# Altium PCB AS800-Temp V1.1.PcbDoc (part 3 of 3)
Units mil, origin at the board's own origin, x right, y up, seen from the top; angles counter-clockwise.
Board outline 4813.18 x 5128.14 mil, 2 copper layers (Top Layer, Bottom Layer); 246 components, 215 nets, 915 pads, 639 vias.
Unrouted connection lines stored in the file: 2.
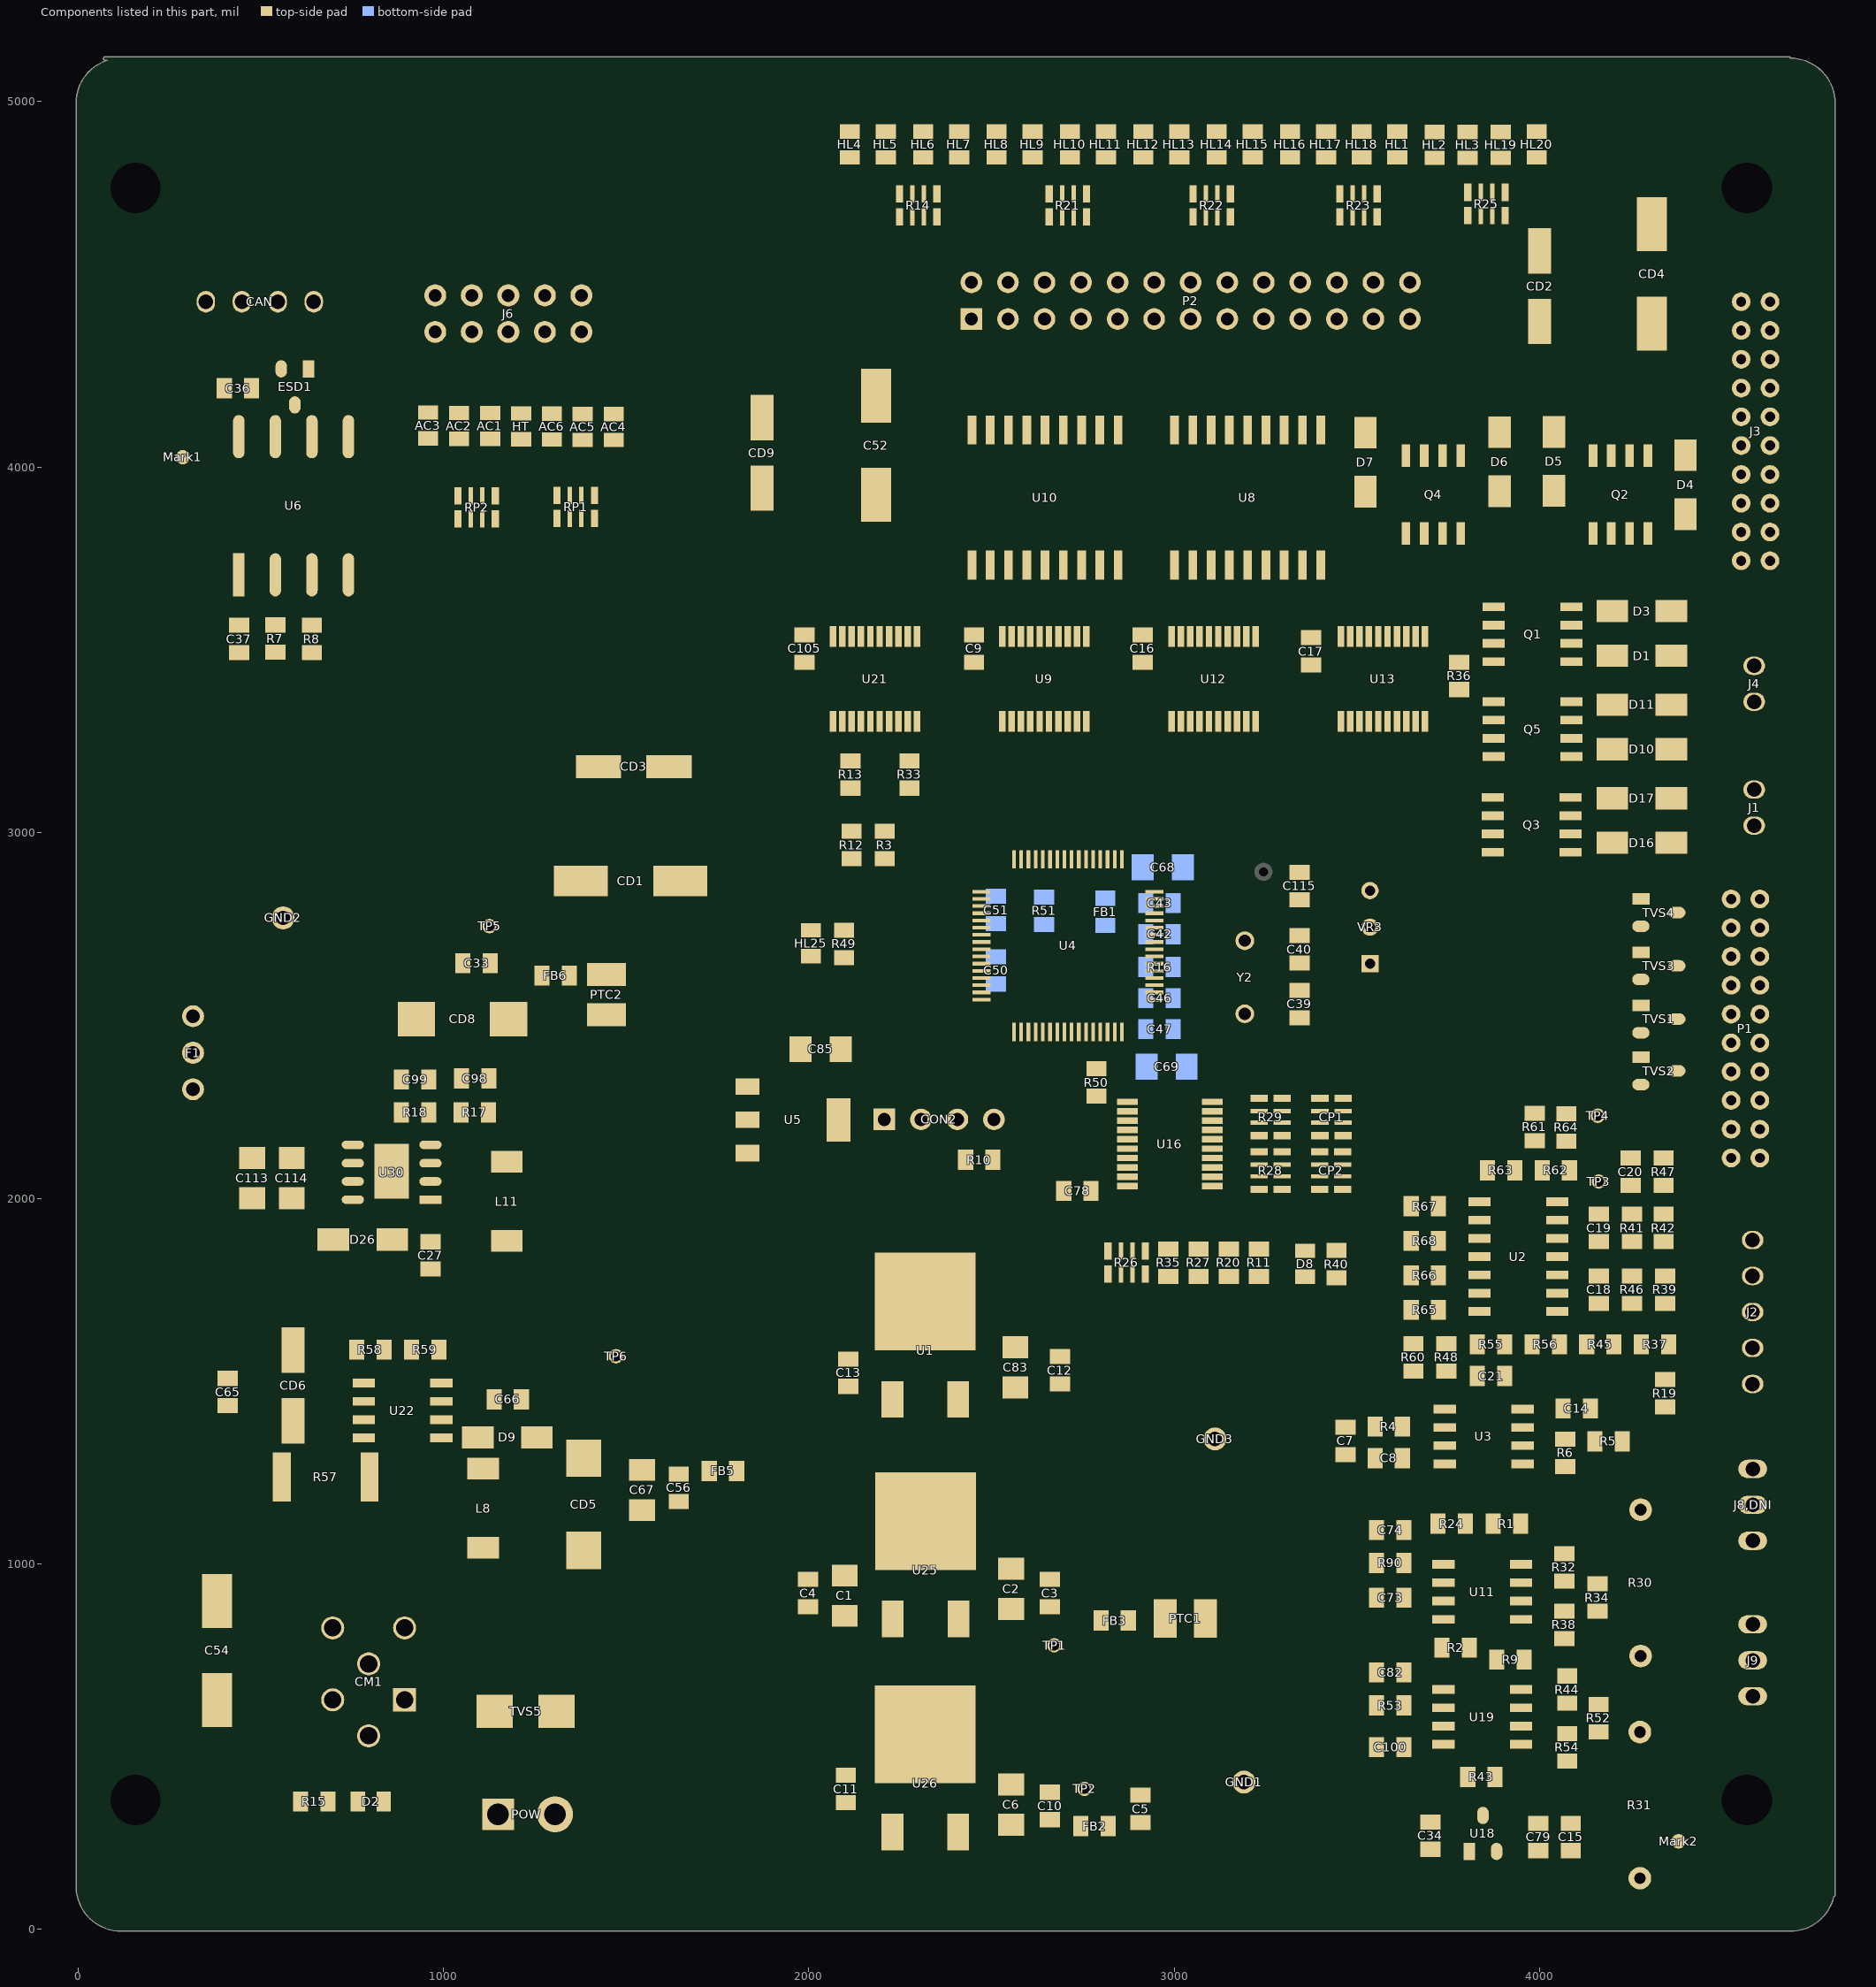
[diagram p3: the components of this part, seen from the top]

## Silkscreen, mask and mechanical layers (free items; w line width, h text height)
Top Overlay:
  circle w3.94: c2875.09,1765.38 r5.57
  circle w3.94: c3241.64,2893 r49.61
  region: 1347.4,3300 204,3300 204,3035.2 1347.4,3035.2
  lines w7.87: 177.17,11.81 177.17,4728.35 ; 4507.87,11.81 4507.87,4720.47
  text "C12" at 3173.23,4688.98 h100
  text "C7" at 417.08,4633.86 h100
  text "C8" at 1108,4620 h100
  text "5V" at 304.08,4555.12 h40
  text "G" at 440.7,4551.18 h40
  text "H" at 544.08,4551.18 h40
  text "L" at 653.3,4551.18 h40
  text "Valve and Pump" at 2646.42,4191 h50
  text "C12B" at 4783.46,3996.06 h80 r90
  text "C13B" at 4775.59,3267.72 h80 r90
  text "Temp offset" at 3295.28,2972.44 h39.37
  text "T15" at 3094.49,2940.94 h78.74
  text "C13A" at 4783.46,2933.07 h80 r90
  text "AS800 TempCB V1.1" at 188,2926 h78.74
  text "12V" at 1184,2721 h40
  text "GND" at 516,2648 h31.5
  text "0.1C/0.1V" at 3392,2371 h78.74
  text "C14" at 4779.12,2353 h100 r90
  text "SCK" at 2470,2293 h31.5
  text "GND" at 2263,2291 h31.5
  text "DAT" at 2369,2291 h31.5
  text "VCC" at 2152,2290 h31.5
  text "Fan" at 59.06,2118.11 h100
  text "C15" at 4793,1567 h100 r90
  text "-9.6V" at 1531,1545 h40
  text "+5V" at 2512,1351 h31.5
  text "C16" at 4793,1027 h100 r90
  text "+5V" at 2599,678 h40
  text "C17" at 4788,608 h100 r90
  text "24V" at 1263,454 h50
  text "GND" at 1057,453 h50
  text "-5V" at 2709,442 h31.5
  text "POWER" at 1440,324 h70
Mechanical 1:
  lines w10: 0,106.3 0,4996.06 cw(c118.11,4996.06) 118.11,5114.17 ; 0,118.11 ccw(c118.11,118.11) 118.11,0 4685.04,0 ccw(c4685.04,118.11) 4803.15,118.11 ; 74.8,5118.11 4681.1,5118.11 ; 4685.04,5114.17 cw(c4685.04,4996.06) 4803.15,4996.06 4803.15,94.49